# EAGLE board Light Following Robot (EAGLE 9.7.0)

Size 327.38 x 158.76 mm. Coordinates in mm from the lower left corner, seen from the top.
Outline: 0,0 327.38,0 327.38,158.76 0,158.76 0,0
Copper layers (1*16): Top 0.035mm / dielectric 1.5mm / Bottom 0.035mm
Design rules "default": minimum track width 6mil, minimum drill 0.35mm, track to track 6mil, track to pad 6mil, pad to pad 6mil, via to via 6mil, smd to smd 6mil, copper to edge 40mil, drill to drill 6mil, minimum pad ring 10mil, minimum via ring 8mil, stop-mask expansion 4mil, vias tented up to drill 0mil, thermal gap 10mil

## Footprints (pad centres in the part's own frame; a part is rotated, then mirrored left to right if it is on the bottom)
BATTERY-GENERIC = drill 1.118 pad 3.15 octagon: + 2.54,0; - -2.54,0
MOTOR = drill 1.118 pad 3.15 octagon: + 2.54,0; - -2.54,0
RESAD1016W63L850D250B = drill 0.83 pad 1.43: 1 -5.08,0; 2 5.08,0
GL5528 = drill 0.8 pad 1.4: 1 -1.702,0; 2 1.702,0
ARDUINO-UNO-R3-SHIELD = drill 1.016 pad 1.88: 3.3V 24.13,-2.54; 5V 24.13,0; A0 24.13,12.7; A1 24.13,15.24; A2 24.13,17.78; A3 24.13,20.32; A4 24.13,22.86; A5 24.13,25.4; AREF -24.13,-13.97; D2 -24.13,20.32; D3 -24.13,17.78; D4 -24.13,15.24; D5 -24.13,12.7; D6 -24.13,10.16; D7 -24.13,7.62; D8 -24.13,3.81; D9 -24.13,1.27; D10 -24.13,-1.27; D11 -24.13,-3.81; D12 -24.13,-6.35; D13 -24.13,-8.89; GND@0 24.13,2.54; GND@1 24.13,5.08; GND@2 -24.13,-11.43; IOREF 24.13,-7.62; NC 24.13,-10.16; RES 24.13,-5.08; RX -24.13,25.4; SCL -24.13,-19.05; SDA -24.13,-16.51; TX -24.13,22.86; VIN 24.13,7.62
DIP762W53P254L1969H508Q16B = drill 0.743 pad 1.343: 1 -3.81,8.89; 2 -3.81,6.35; 3 -3.81,3.81; 4 -3.81,1.27; 5 -3.81,-1.27; 6 -3.81,-3.81; 7 -3.81,-6.35; 8 -3.81,-8.89; 9 3.81,-8.89; 10 3.81,-6.35; 11 3.81,-3.81; 12 3.81,-1.27; 13 3.81,1.27; 14 3.81,3.81; 15 3.81,6.35; 16 3.81,8.89
LCD-I2C = drill 1.016 long: 1 -19.05,-5.08; 2 -19.05,-7.62; 3 -19.05,-10.16; 4 -19.05,-12.7
TO220V = drill 1.016 long: 1 -2.54,-2.54; 2 0,-2.54; 3 2.54,-2.54

## Placement (x,y rotation side)
BAT1  9V  [BATTERY-GENERIC]  43.21,8.26 180 top
MLEFT_MOTOR  MOTOR_HDR  [MOTOR]  183.96,150.5 0 top
MRIGHT_MOTOR  MOTOR_HDR  [MOTOR]  183.19,10.33 180 top
R1  1k  [RESAD1016W63L850D250B]  142.83,100.49 90 top
R3  1k  [RESAD1016W63L850D250B]  158.07,100.49 90 top
RLEFT  PHOTOCELL_GL5528  [GL5528]  112.4,140.55 0 top
RRIGHT  PHOTOCELL_GL5528  [GL5528]  133.4,140.47 0 top
U1  ARDUINO-UNO-R3-SHIELD  [ARDUINO-UNO-R3-SHIELD]  48.55,80.33 270 top
U2  L293E  [DIP762W53P254L1969H508Q16B]  184.74,81.44 90 top
U3  LCD-16X2-I2CSUNFOUNDER-IIC  [LCD-I2C]  271.75,100.68 0 top
U4  LM7805_TO220V  [TO220V]  8.51,16.45 0 top

## Library data of the parts
BAT1 MLEFT_MOTOR MRIGHT_MOTOR R1 R3 RLEFT RRIGHT U1-U4 = Tinkercad

## Nets
BAT1+: BAT1.+ U4.1
BAT1-: BAT1.- R1.2 R3.2 U1.GND@0 U1.GND@1 U1.GND@2 U2.4 U2.5 U2.12 U2.13 U3.1 U4.2
MLEFT_MOTOR_+: MLEFT_MOTOR.+ U2.11
MLEFT_MOTOR_-: MLEFT_MOTOR.- U2.14
MRIGHT_MOTOR_+: MRIGHT_MOTOR.+ U2.3
MRIGHT_MOTOR_-: MRIGHT_MOTOR.- U2.6
U1_5V: RLEFT.1 RRIGHT.1 U1.5V U2.8 U2.16 U3.2 U4.3
U1_A1: R1.1 RLEFT.2 U1.A1
U1_A2: R3.1 RRIGHT.2 U1.A2
U1_A4: U1.A4 U3.3
U1_A5: U1.A5 U3.4
U1_D2: U1.D2 U2.7
U1_D3: U1.D3 U2.10
U1_D4: U1.D4 U2.15
U1_D5: U1.D5 U2.1
U1_D6: U1.D6 U2.9
U1_TX: U1.TX U2.2

## Tracks (layer width: path | path; a pad name or v marks a point on that pad's centre or on a via)
BAT1+  (1 unrouted)
BAT1-  (11 unrouted)
MLEFT_MOTOR_+  (1 unrouted)
MLEFT_MOTOR_-  (1 unrouted)
MRIGHT_MOTOR_+  (1 unrouted)
MRIGHT_MOTOR_-  (1 unrouted)
U1_5V  (6 unrouted)
U1_A1  (2 unrouted)
U1_A2  (2 unrouted)
U1_A4  (1 unrouted)
U1_A5  (1 unrouted)
U1_D2  (1 unrouted)
U1_D3  (1 unrouted)
U1_D4  (1 unrouted)
U1_D5  (1 unrouted)
U1_D6  (1 unrouted)
U1_TX  (1 unrouted)